# Altium PCB JacdacBreadboardRingsWasherG 109Q.PcbDoc
Units mm, origin at the board's own origin, x right, y up, seen from the top; angles counter-clockwise.
Board outline 6 x 6 mm, 2 copper layers (Top Layer, Bottom Layer), stack 1.525 mm thick; 1 components, 1 nets, 16 pads, 0 vias.
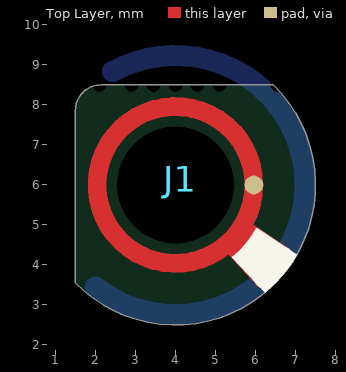
[diagram p0: Top Layer view]
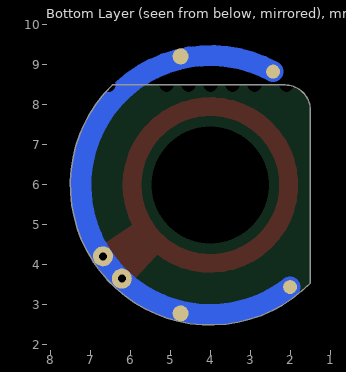
[diagram p1: Bottom Layer view, seen from below]

## Layer stack, top to bottom
Top Solder: solder mask 0.0102, Solder Resist, Dk 3.5
Top Layer: signal copper 0.0356
Dielectric 1: core 1.454, FR-4, Dk 4.2
Bottom Layer: signal copper 0.0356
Bottom Solder: solder mask 0.0102, Solder Resist, Dk 3.5

## Board outline
1.498,3.552 ccw(c4,6) 6.448,8.501 6.448,8.5 2.133,8.5 ccw(c2.133,7.867) 1.5,7.867

## Design rules (kind name [scope] priority, off if disabled: settings)
AssemblyTestPointUsage [All] p1: valid=2
BoardOutlineClearance [All] p1: gap=0.3 ignorepadtopadclearanceinfootprint=FALSE except(0: Arc-OutlineEdge Arc-SplitContinuation Track-OutlineEdge Track-SplitContinuation SMDPad-SplitContinuation THPad-SplitContinuation Via-SplitContinuation Fill-SplitContinuation Poly-SplitContinuation Region-OutlineEdge Region-SplitContinuation Text-OutlineEdge Text-SplitContinuation; 0.2: SMDPad-OutlineEdge THPad-OutlineEdge Via-OutlineEdge Fill-OutlineEdge Poly-OutlineEdge Region-CavityEdge Region-CutoutEdge Region-SplitBarrior Text-CavityEdge Text-CutoutEdge Text-SplitBarrior)
Clearance [All] p1: gap=0.142 ignorepadtopadclearanceinfootprint=FALSE
ComponentClearance MH5.0KeepoutaAreaClearance [InComponent('MH1') or InComponent('MH2')  or InComponent('MH3') or InComponent('MH4') vs InComponent('D6') or InComponent('D7') or InComponent('D8') or InComponent('D9') or InComponent('D10') or InComponent('D11') or InComponent('D12') or InComponent('D13') or InComponent('C6') or InComponent('C7') or InComponent('C8')  or  InComponent('C9') or  InComponent('C12')] p1: gap=0 collisioncheckmode=3 verticalgap=0 showdistances=FALSE
ComponentClearance [All] p2: gap=0.2 collisioncheckmode=3 verticalgap=0.2 showdistances=FALSE
DiffPairsRouting [All] p1: maxlimit=2 minlimit=0.15 mostfreqgap=0.15 toplayer_minwidth=0.15 toplayer_maxwidth=2 toplayer_prefwidth=0.15 bottomlayer_minwidth=0.15 bottomlayer_maxwidth=2 bottomlayer_prefwidth=0.15 maxuncoupledlength=25
FabricationTestPointUsage [All] p1: valid=2 allowmultiple=FALSE
HoleSize [All] p1: absolutevalues=TRUE maxlimit=5 minlimit=0.2 maxpercent=80.000 minpercent=20.000
HoleToHoleClearance HoleToHoleClearance_J3_J4 [InComponent('J3') vs InComponent('J4')] p1: gap=2.54 allowstackedmicrovias=TRUE
HoleToHoleClearance [All] p2: gap=0.254 allowstackedmicrovias=TRUE
MinimumSolderMaskSliver [All] p1: minsoldermaskwidth=0.005
PlaneClearance [All] p1: clearance=0.2
PlaneConnect [All] p1: planeconnectstyle=Relief reliefexpansion=0.5 reliefentries=4 reliefconductorwidth=0.2 reliefairgap=0.3
PolygonConnect [All] p1: connectstyle=Direct reliefconductorwidth=0.2 reliefentries=4 polygonreliefangle="90 Angle" airgapwidth=0.2
RoutingVias RoutingVias_Power [InNetClass('Power')] p1: holewidth=0.4 width=0.8 viastyle="Through Hole" minholewidth=0.3 minwidth=0.6 maxholewidth=0.4 maxwidth=1
RoutingVias [All] p2: holewidth=0.3 width=0.6 viastyle="Through Hole" minholewidth=0.3 minwidth=0.6 maxholewidth=0.3 maxwidth=0.8
SilkToSilkClearance [All] p1: silktosilkclearance=0.001
SilkToSolderMaskClearance [IsPad] p1: minsilkscreentomaskgap=0.05 clearancetoexposedcopper=TRUE
SolderMaskExpansion [All] p1: expansion=0.075 istentingtop=FALSE
UnRoutedNet [All] p1: checkbadconnections=TRUE
ViasUnderSMD [not ( HasFootprint('JACDAC_EDGE_CONNECTOR_NO_TRACES') or HasFootprint('JACDAC_EDGE_CONNECTOR_NO_TRACES_CABLE_GUIDE') )] p1: allowed=FALSE
Width Width_Power [InNetClass('Power')] p1: maxlimit=1 minlimit=0.2 preferedwidth=0.5
Width [All] p2: maxlimit=1 minlimit=0.13 preferedwidth=0.13 minimp=50.000000 maximp=50.000000 favimp=50.000000
18 further rules are at their usual default settings.

## Components (designator, comment, footprint, x,y, rotation, side; value= is the part's Value field where it differs from the comment)
J1 "Jacdac breadboard washer GND" Jacdac_breadboard_transition_hole_rings_pin2_v4-JLC 4,6 r0 top

## Footprints (in the part's own frame and the unit in brackets; to place one, negate y for a bottom-side part, rotate by r counter-clockwise, add the part's x,y. Pads: shape width x height; smd on the part's side, far side on the other; paste and mask are expansions set on the pad)
Jacdac_breadboard_transition_hole_rings_pin2_v4-JLC [mm]
  round 0 hole 0.35 unplated mask+0: 1(-2.45,2.5) 1(-1.9,2.5) 1(-1.105,2.5) 1(-0.555,2.5) 1(-0.005,2.5) 1(0.545,2.5) 1(1.095,2.5) 1(2.55,2.5)
  round 0.35 smd far side paste-1 mask+0: 2(-1.994,-2.552) 2(-1.569,2.832)
  round 0.47 smd paste-1 mask+0: 2(1.96,0)
  round 0.5 hole 0.2 mask+0: 2(2.214,-2.342) 2(2.685,-1.784)
  round 0 hole 2.93 unplated mask+0.6: 16(0,0)
  Top Layer circle w0.47: c0,0 r1.96
  Top Layer lines w0.5: 1.382,-1.446 2.214,-2.342 ccw(c0,0) 2.685,-1.784 1.796,-1.182 2.483,-2.055
  Bottom Layer lines w0.525: -1.994,-2.552 ccw(c0,0) -1.569,2.832
  silkscreen extent 1.42,-2.68 3.03,-1.08, body extent -2.26,-3.51 3.5,3.5, height 0.05

## Part data
J1: Hole Clearance=7.0mm, Hole Size=M3

## Free pads (board coordinates)
  round 0.4 smd far side mask+0: 1(4.742,9.213) 1(4.744,2.789)

## Nets (pads, with @x,y where several pads share a name; then routed paths per layer and width w, separated by ;. In a path a pad name is that pad's centre, name@x,y a point inside that pad or via, vN(x,y) a via of type N, cw(c..) or ccw(c..) an arc to the next point about the centre after c; other vN are vias at no path point)
GND: J1.2 pad.1
pads on no net: J1.1 J1.16

## Other copper
Top Layer:
  text "GTL - Top Layer" at 0.001,-2.147 h1.7
Bottom Layer:
  text "GBL - Bottom Layer" at 0.001,-3.647 h1.7

## Silkscreen, mask and mechanical layers (free items; w line width, h text height)
Top Overlay:
  text "GTO - Top Overlay" at 14.501,-5.183 h1.7
Bottom Overlay:
  text "GBO - Bottom Overlay" at 14.501,-6.683 h1.7
Top Paste:
  text "GTP - Top Paste" at 27.701,-2.147 h1.7
Bottom Paste:
  text "GBP - Bottom Paste" at 27.701,-3.647 h1.7
Top Solder:
  text "GTS - Top Solder (resist)" at 27.701,-5.183 h1.7
Bottom Solder:
  text "GBS - Bottom Solder (resist)" at 27.701,-6.683 h1.7
Fabrication notes:
  text "Copper up to board / edge at customer risk /  / No solder resist or / silk on bottom layer /  / Green solder resist on top" at 9.005,1.988 h1.7
  text "GM3 - Fabrication Notes" at 0.001,-5.183 h1.7
Board Cutout:
  text "GM10 - Board Cutout" at 0.001,-8.183 h1.7
Board Outline:
  lines w0.1: 1.498,3.552 ccw(c4,6) 6.448,8.501 ; 1.5,3.554 1.5,7.867 cw(c2.133,7.867) 2.133,8.5 6.448,8.5
  text "GM11 - Board Outline" at 0.001,-6.683 h1.7
Top Assy:
  text "GM15 - Top Assy" at 14.501,-2.151 h1.7
Bottom Assy:
  text "GM16 - Bottom Assy" at 14.501,-3.651 h1.7